# Altium PCB PCB1.PcbDoc
Units mm, origin at the board's own origin, x right, y up, seen from the top; angles counter-clockwise.
Board outline 38.86 x 37.59 mm, 2 copper layers (Top Layer, Bottom Layer), stack 1.671 mm thick; 19 components, 9 nets, 39 pads, 0 vias.
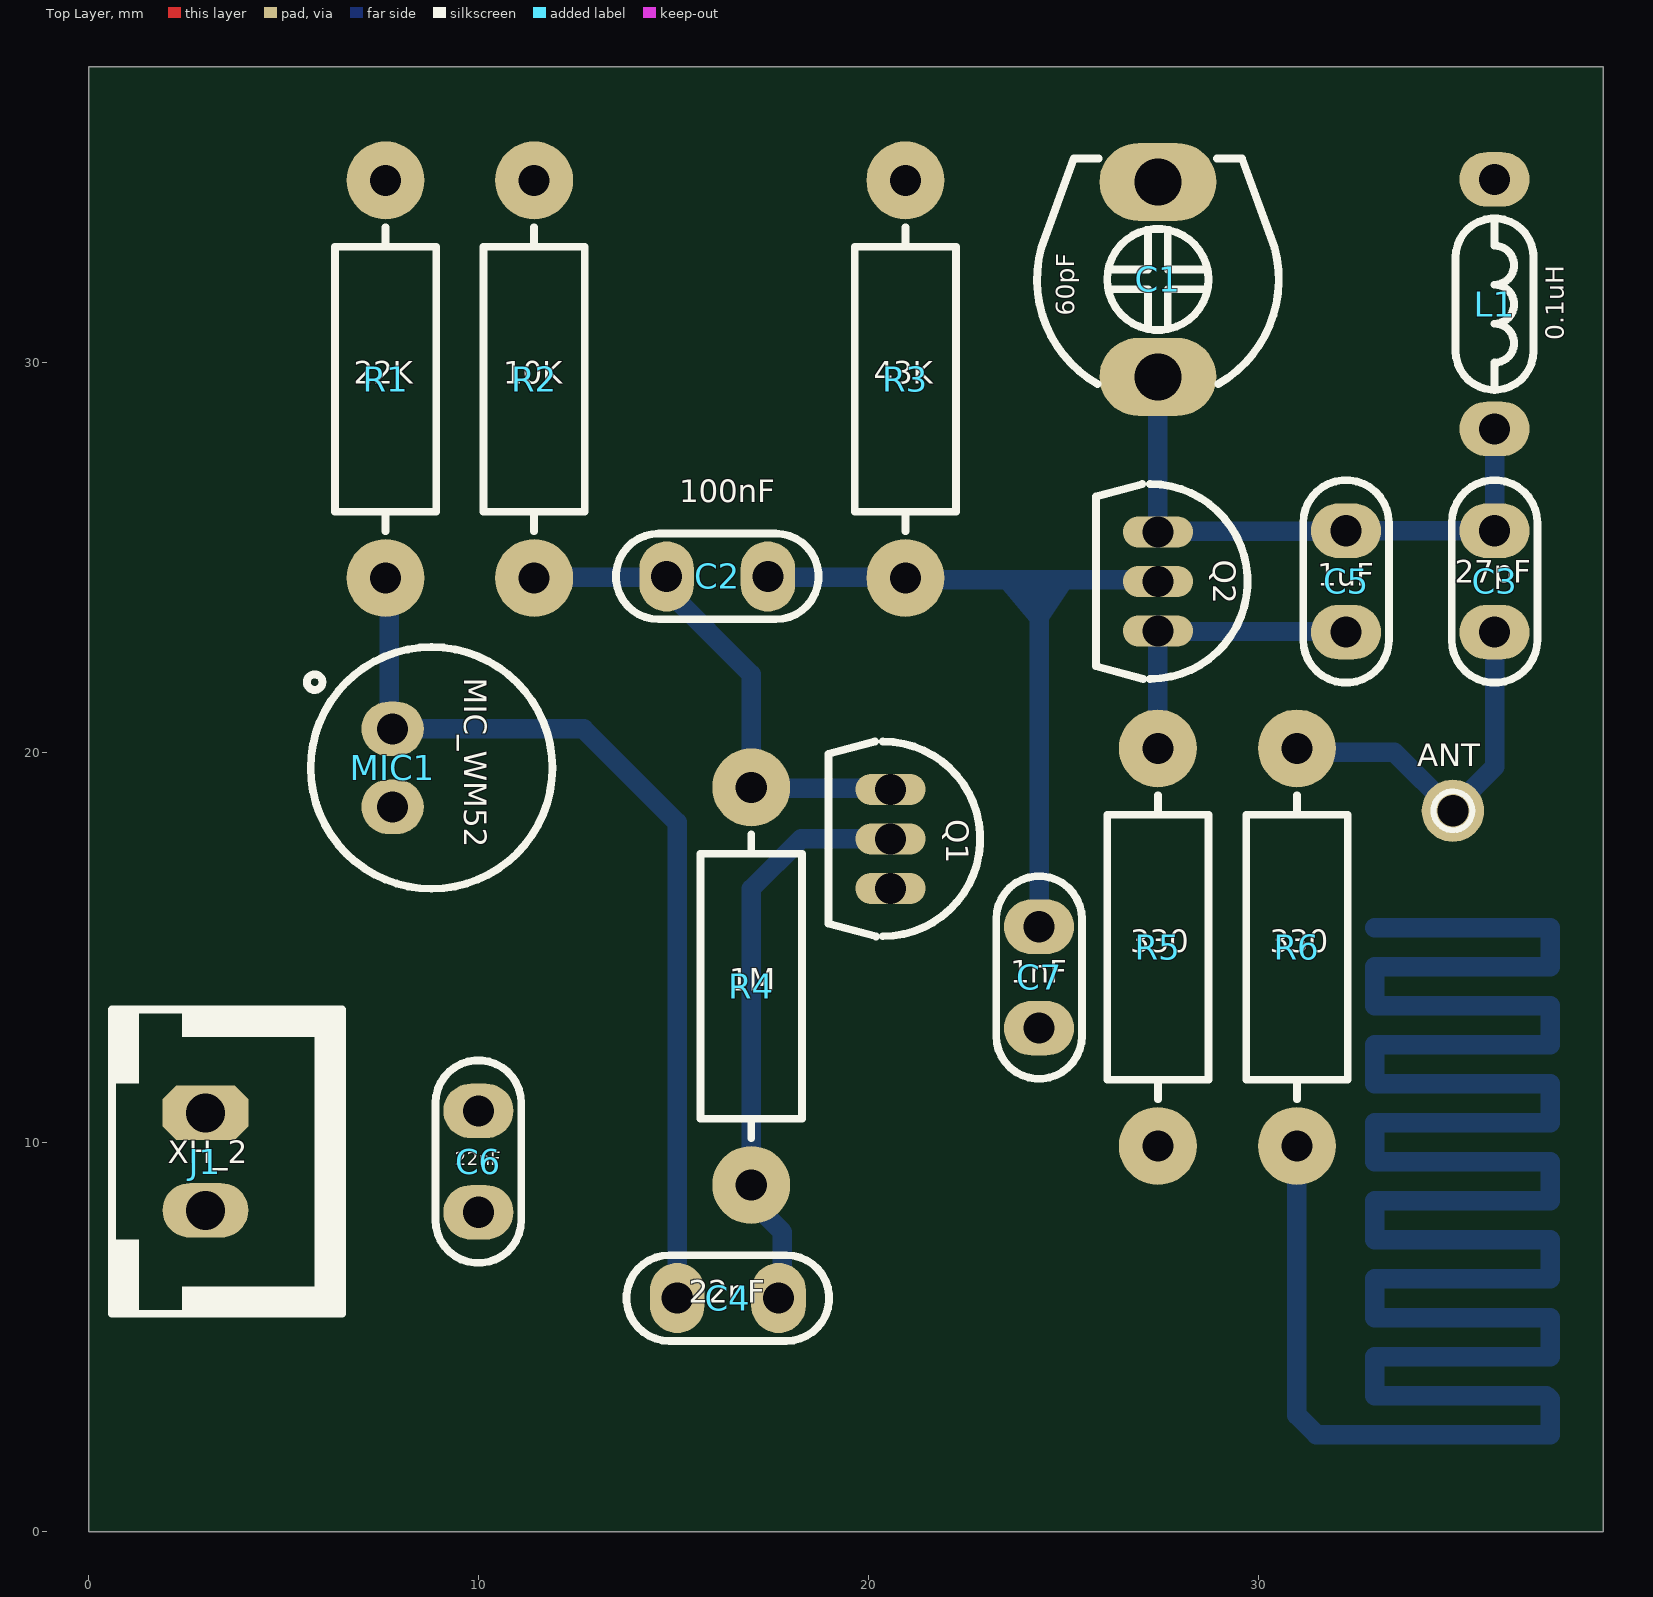
[diagram p0: Top Layer view]
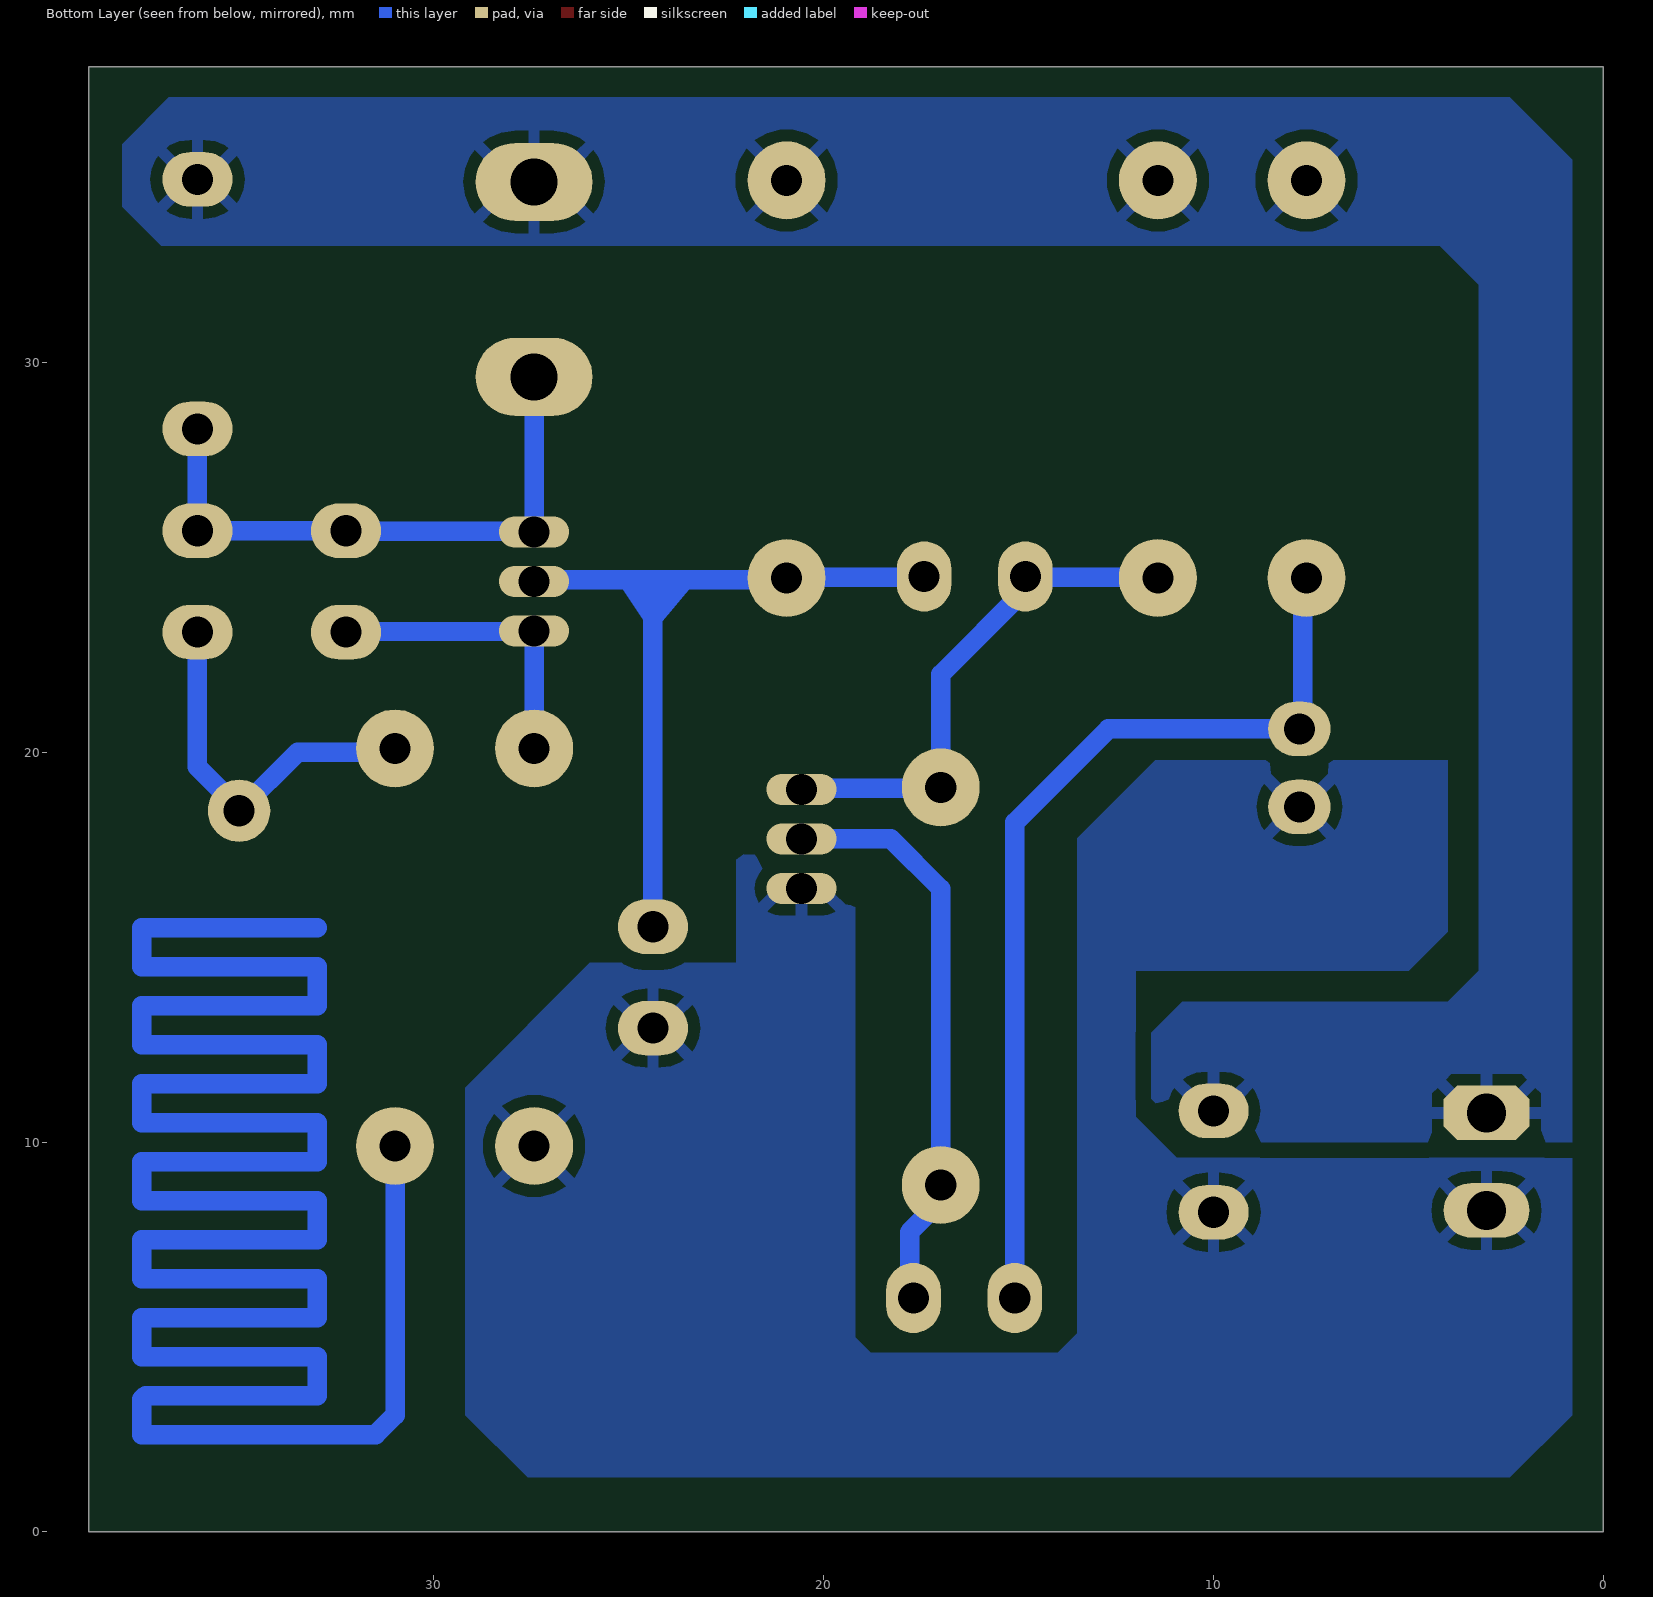
[diagram p1: Bottom Layer view, seen from below]
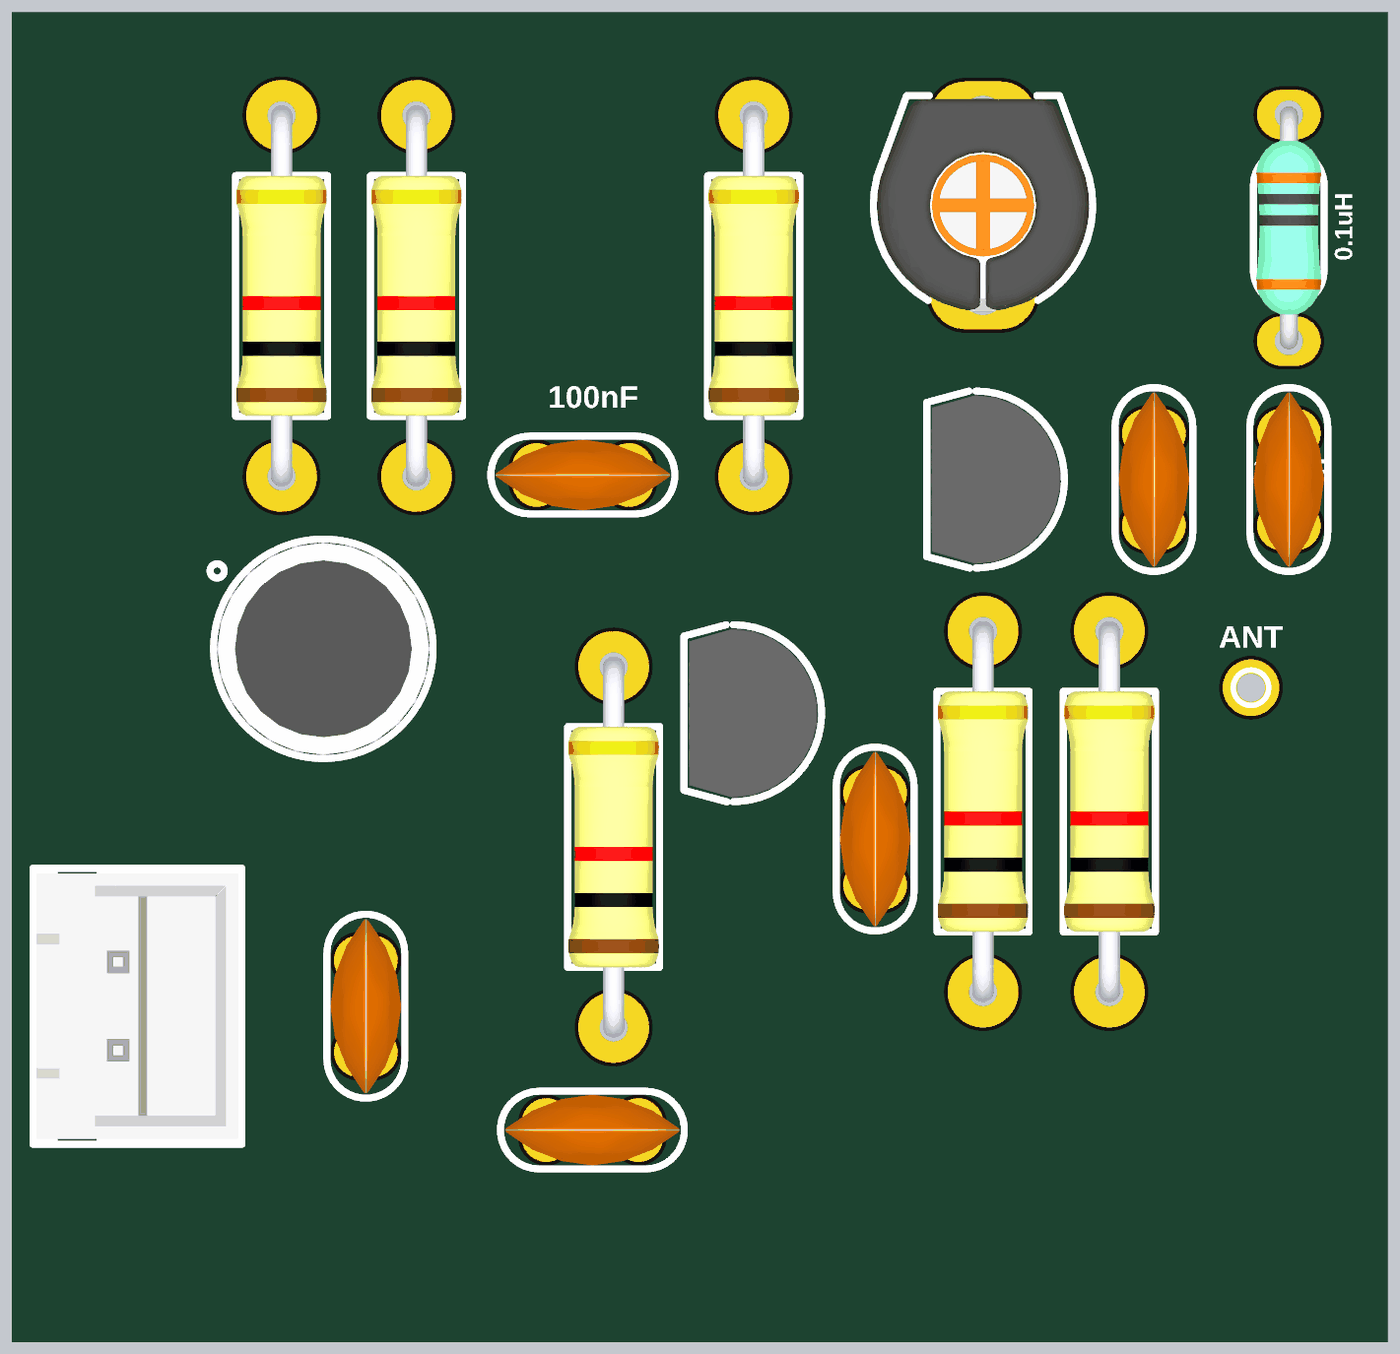
[diagram p2: 3D render of the assembled board from above, using the file's embedded part models]

## Layer stack, top to bottom
Top Solder: solder mask 0.0102, Solder Resist, Dk 3.5
Top Layer: signal copper 0.0356
Dielectric 1: dielectric 1.6, FR-4, Dk 4.8
Bottom Layer: signal copper 0.0356
Bottom Solder: solder mask 0.0102, Solder Resist, Dk 3.5

## Board outline
0,0 38.862,0 38.862,37.592 0,37.592

## Design rules (kind name [scope] priority, off if disabled: settings)
Clearance [All] p1: gap=0.4 ignorepadtopadclearanceinfootprint=FALSE except(0: Arc-Hole Track-Hole SMDPad-Hole THPad-Hole Via-Hole Fill-Hole Poly-Hole Region-Hole Text-Hole; 0.2: Arc-Text Track-Text SMDPad-Text THPad-Text Via-Text Fill-Text Poly-Text Region-Text Text-Text)
PolygonConnect [All] p1: thpad.connectstyle=Relief thpad.reliefconductorwidth=0.3 thpad.reliefentries=4 thpad.polygonreliefangle="90 Angle" thpad.airgapwidth=0.3 thpad.conductorbypadedge=TRUE thpad.mindistance=0.381 thpad.enablemindistance=FALSE smdpad.connectstyle=Relief smdpad.reliefconductorwidth=0.3 smdpad.reliefentries=4 smdpad.polygonreliefangle="90 Angle" smdpad.airgapwidth=0.3 smdpad.conductorbypadedge=TRUE smdpad.mindistance=0.381 smdpad.enablemindistance=FALSE via.connectstyle=Direct via.reliefconductorwidth=0.254 via.reliefentries=4 via.polygonreliefangle="90 Angle" via.airgapwidth=0.254
RoutingVias [All] p1: holewidth=0.711 width=1.27 viastyle="Through Hole" minholewidth=0.711 minwidth=1.27 maxholewidth=0.711 maxwidth=1.27
SolderMaskExpansion [All] p1: expansion=0.102 istentingtop=FALSE
SupplyNets "Schematic Supply Nets_2" [InNet('ANT')] p1: voltage=0.000
SupplyNets "Schematic Supply Nets_1" [InNet('GND')] p2: voltage=0.000
SupplyNets "Schematic Supply Nets" [InNet('VCC')] p3: voltage=0.000
Width [All] p1: maxlimit=1 minlimit=0.3 preferedwidth=0.5 minimp=50.000000 maximp=50.000000 favimp=50.000000
30 further rules are at their usual default settings.

## Classes and differential pairs
component class Sheet1: ANT C1 C2 C3 C4 C5 C6 C7 J1 L1 MIC1 Q1 Q2 R1 R2 R3 R4 R5

## Components (designator, comment, footprint, x,y, rotation, side; value= is the part's Value field where it differs from the comment)
ANT "TESTPOINT_PROBE" TP80D50 35,18.5 r90 top value=VALUE
C1 "60pF" CTRM_6X6 27.432,32.131 r90 top
C2 "100nF" C_CER_D5 16.129,24.511 r0 top
C3 "27pF" C_CER_D5 36.068,24.384 r270 top
C4 "22nF" C_CER_D5 16.4,6 r0 top
C5 "1uF" C_CER_D5 32.258,24.384 r90 top
C6 "22nF" C_CER_D5 10,9.5 r90 top
C7 "1nF" C_CER_D5 24.384,14.224 r90 top
J1 "XH_2" XH_2 3,9.5 r270 top
L1 "0.1uH" LT_AX025 36.068,31.496 r270 top
MIC1 "MIC_WM52" MIC_C6 8.8,19.6 r0 top
Q1 "BC547" TO92_3 20.574,17.78 r270 top
Q2 "BC547" TO92_3 27.432,24.384 r270 top
R1 "22K" R025W_AX04 7.62,29.571 r90 top
R2 "10K" R025W_AX04 11.43,29.571 r90 top
R3 "43K" R025W_AX04 20.955,29.571 r90 top
R4 "1M" R025W_AX04 17,14 r90 top
R5 "330" R025W_AX04 27.432,15 r90 top
R6 "330" R025W_AX04 31,15 r90 top (schematic designator R5)

## Footprints (in the part's own frame and the unit in brackets; to place one, negate y for a bottom-side part, rotate by r counter-clockwise, add the part's x,y. Pads: shape width x height; smd on the part's side, far side on the other; paste and mask are expansions set on the pad)
C_CER_D5 [mm] "CAP, CER, D:5mm, pitch: 2.5mm"
  oval 1.4x1.8 hole 0.8: 1(-1.3,0) 2(1.3,0)
  silkscreen extent -2.6,-1.1 2.6,1.1, body extent -2.46,-1 2.46,1, height 5.45
CTRM_6X6 [mm] "CAP, TRIMMER, Murata TZ03"
  oval 2x3 hole 1.2: 1(-2.5,0) 2(2.5,0)
  silkscreen extent -2.68,-3.1 3.1,3.1, body extent -3,-3 3,3, height 4.8
LT_AX025 [mm] "INDUCTOR, Axial, 6.4mm,"
  oval 1.4x1.8 hole 0.8 mask+0.1: 1(-3.2,0) 2(3.2,0)
  silkscreen extent -2.2,-1 2.2,1, body extent -3.43,-0.92 3.43,0.92, height 1.92
MIC_C6 [mm] "MIC, WM-63PR, POM-3535P-3-R"
  oval 1.6x1.4 hole 0.8: 1(-1,1) 2(-1,-1)
  silkscreen extent -3.2,-3.1 3.1,3.1, body extent -3,-3 3,3, height 2.4
R025W_AX04 [mm] "RESISTOR 1/4 WATT, AXIAL0.4"
  round 2 hole 0.8: 1(-5.1,0) 2(5.1,0)
  silkscreen extent -3.9,-1.3 3.9,1.3, body extent -5.38,-1.28 5.38,1.28, height 2.6
TO92_3 [mm] "TO-92, SOT54"
  oval 0.8x1.8 hole 0.8 mask+0.1: 1(-1.27,0) 2(0,0) 3(1.27,0)
  silkscreen extent -2.5,-1.59 2.5,2.3, body extent -2.38,-1.45 2.38,2.18, height 7.82
TP80D50 [mm]
  round 1.6 hole 0.8: 1(0,0)
  silkscreen extent -0.5,-0.5 0.5,0.5
XH_2 [mm] "PW10-x-M, JST-BxB-XH-A pitch: 2.5mm, 3A/250v"
  oct 1.4x2.2 hole 1: 1(-1.25,0)
  oval 1.4x2.2 hole 1: 2(1.25,0)
  silkscreen extent -3.9,-2.4 3.9,3.5, body extent -3.75,-2.3 3.75,3.4, height 7

## Part data
ANT: "TEST POINT", MANF=MANF, MANF_P#=MANF_P#
C1: library part CAP_THD_TRIMMER, "CAP, THD, TRIMMER", ASSEMBLY=ASSEMBLY, DESC="CAP, SMD, TRIMMER", MANF=MANF, MANF_P#=MANF_PART#, PARAM=PARAM, PARAM2=PARAM2, PRICE="100= 1$"
C2 C3 C4 C5 C6 C7: library part CAP_THD_CER, "CAP, THD, CER MULTI LAYER,", ASSEMBLY=ASSEMBLY, DESC="CAP, CER MULTI LAYER,", MANF=MANF, MANF_P#=MANF_PART#, PARAM2=50V, PRICE="100= 1$"
J1: "PW10-x-M, JST-BxB-XH-A pitch: 2.5mm, 3A/250v", MANF=JST, MANF_P#=B2B-XH-A, PARAM=3.0A, PARAM2=250v
L1: library part IND_THD, "INDUCTOR, THD", L1=0.1uH
MIC1: library part MIC_WM-52, "MICROPHONE OMNI", MANF_P#=WM52BM, PRICE=PRICE
Q1 Q2: library part NPN_BC547_TO92, "BJT, NPN, 45v, 0.1A, THD, TO92", MANF=FAIRCHILD, MANF_P#=BC547, PARAM="0.1A, Hfe110~800", PARAM2="45v, 500mW"
R1 R2 R3 R4 R5 R6: library part RES_THD, "RESISTOR, THD", ASSEMBLY=ASSEMBLY, DESC=DESCRIPTION, DIST#=MOUSER, MANF="KOA SPEER", MANF_P#=RK73H1ETTP4701F, PARAM=0.063W, PARAM2=1%, PRICE="100= 0.5$"

## Nets (pads, with @x,y where several pads share a name; then routed paths per layer and width w, separated by ;. In a path a pad name is that pad's centre, name@x,y a point inside that pad or via, vN(x,y) a via of type N, cw(c..) or ccw(c..) an arc to the next point about the centre after c; other vN are vias at no path point)
ANT: ANT.1 C3.2 R6.2 | length 9.7
  Bottom Layer w0.5: R6.2 31.1,20 33.5,20 ANT.1 35,18.556 36.068,19.624 C3.2
GND: C6.1 C7.1 J1.2 MIC1.2 Q1.3 R5.1
NetC1_1: C1.1 C3.1 C5.2 L1.2 Q2.1 | length 15.2
  Bottom Layer w0.5: C1.1 Q2.1 27.447,25.669 32.243,25.669 C5.2 C3.1 L1.2
NetC2_1: C2.1 Q1.1 R2.1 R4.2 | length 13.3
  Bottom Layer w0.5: R2.1 11.45,24.491 14.809,24.491 C2.1 14.829,24.171 17,22 R4.2 17.025,19.075 20.549,19.075 Q1.1
NetC2_2: C2.2 C7.2 Q2.2 R3.1 | length 19
  Bottom Layer w0.5: C2.2 17.449,24.491 20.935,24.491 R3.1 20.999,24.428 24.481,24.428 ; C7.2 24.384,24.331 cw(c24.481,24.331) 24.481,24.428 ; Q2.2 27.388,24.428 24.481,24.428
NetC4_1: C4.1 MIC1.1 R1.1 | length 24.4
  Bottom Layer w0.5: R1.1 7.71,24.381 7.71,20.69 MIC1.1 12.7,20.6 15.1,18.2 C4.1
NetC4_2: C4.2 Q1.2 R4.1 | length 14.9
  Bottom Layer w0.5: C4.2@17.8,6 17.8,7.694 17,8.494 R4.1 17,16.5 18.28,17.78 Q1.2
NetC5_1: C5.1 Q2.3 R5.2 | length 7.9
  Bottom Layer w0.5: R5.2 Q2.3 27.447,23.099 32.243,23.099 C5.1
VCC: C1.2 C6.2 J1.1 L1.1 R1.2 R2.2 R3.2
pads on no net: R6.1
copper on no net: | length 85
  Bottom Layer w0.5: 31,9.9 31,4.273 31,3 31.5,2.5 37.5,2.5 37.5,3.207 37.5,3.4 37.4,3.5 33,3.5 33,4.5 37.5,4.5 37.5,5.5 33,5.5 33,6.5 37.5,6.5 37.5,7.5 33,7.5 33,8.5 37.5,8.5 37.5,9.5 33,9.5 33,10.5 37.5,10.5 37.5,11.5 33,11.5 33,12.5 37.5,12.5 37.5,13.5 33,13.5 33,14.5 37.5,14.5 37.5,15.5 33,15.5

## Polygon pours and split planes (outlines as drawn)
GND on Bottom Layer "GND_L02_P002" (solid, pour order 2): 19.2,15.4 19.2,17.85 21.639,17.85 22.25,17.427 22.25,14.6 26,14.6 29.2,11.4 29.2,3 27.6,1.4 2.4,1.4 0.8,3 0.8,9.6 10.95,9.6 12,10.65 12,14.4 5,14.4 4,15.4 4,19.8 11.5,19.8 13.5,17.8 13.5,5.1 14,4.6 18.8,4.6 19.2,5 19.2,15
VCC on Bottom Layer "VCC_L02_P000" (solid, pour order 0): 38,34 38,35.6 36.8,36.8 2.4,36.8 0.8,35.2 0.8,10 11,10 11.6,11 11.6,12.8 10.8,13.6 4,13.6 3.2,14.4 3.2,32 4.2,33 37,33

## Other copper
Bottom Layer:
  region net NetC2_2: 23.15,24.55 25.4,24.55 24.4,23.05

## Silkscreen, mask and mechanical layers (free items; w line width, h text height)
Top Overlay:
  drawing of 159 lines, arcs and shapes, not listed